# Altium PCB Adapter.PcbDoc
Units mm, origin at the board's own origin, x right, y up, seen from the top; angles counter-clockwise.
Board outline 70 x 70 mm, 2 copper layers (Top Layer, Bottom Layer), stack 0.325 mm thick; 7 components, 24 nets, 80 pads, 0 vias.
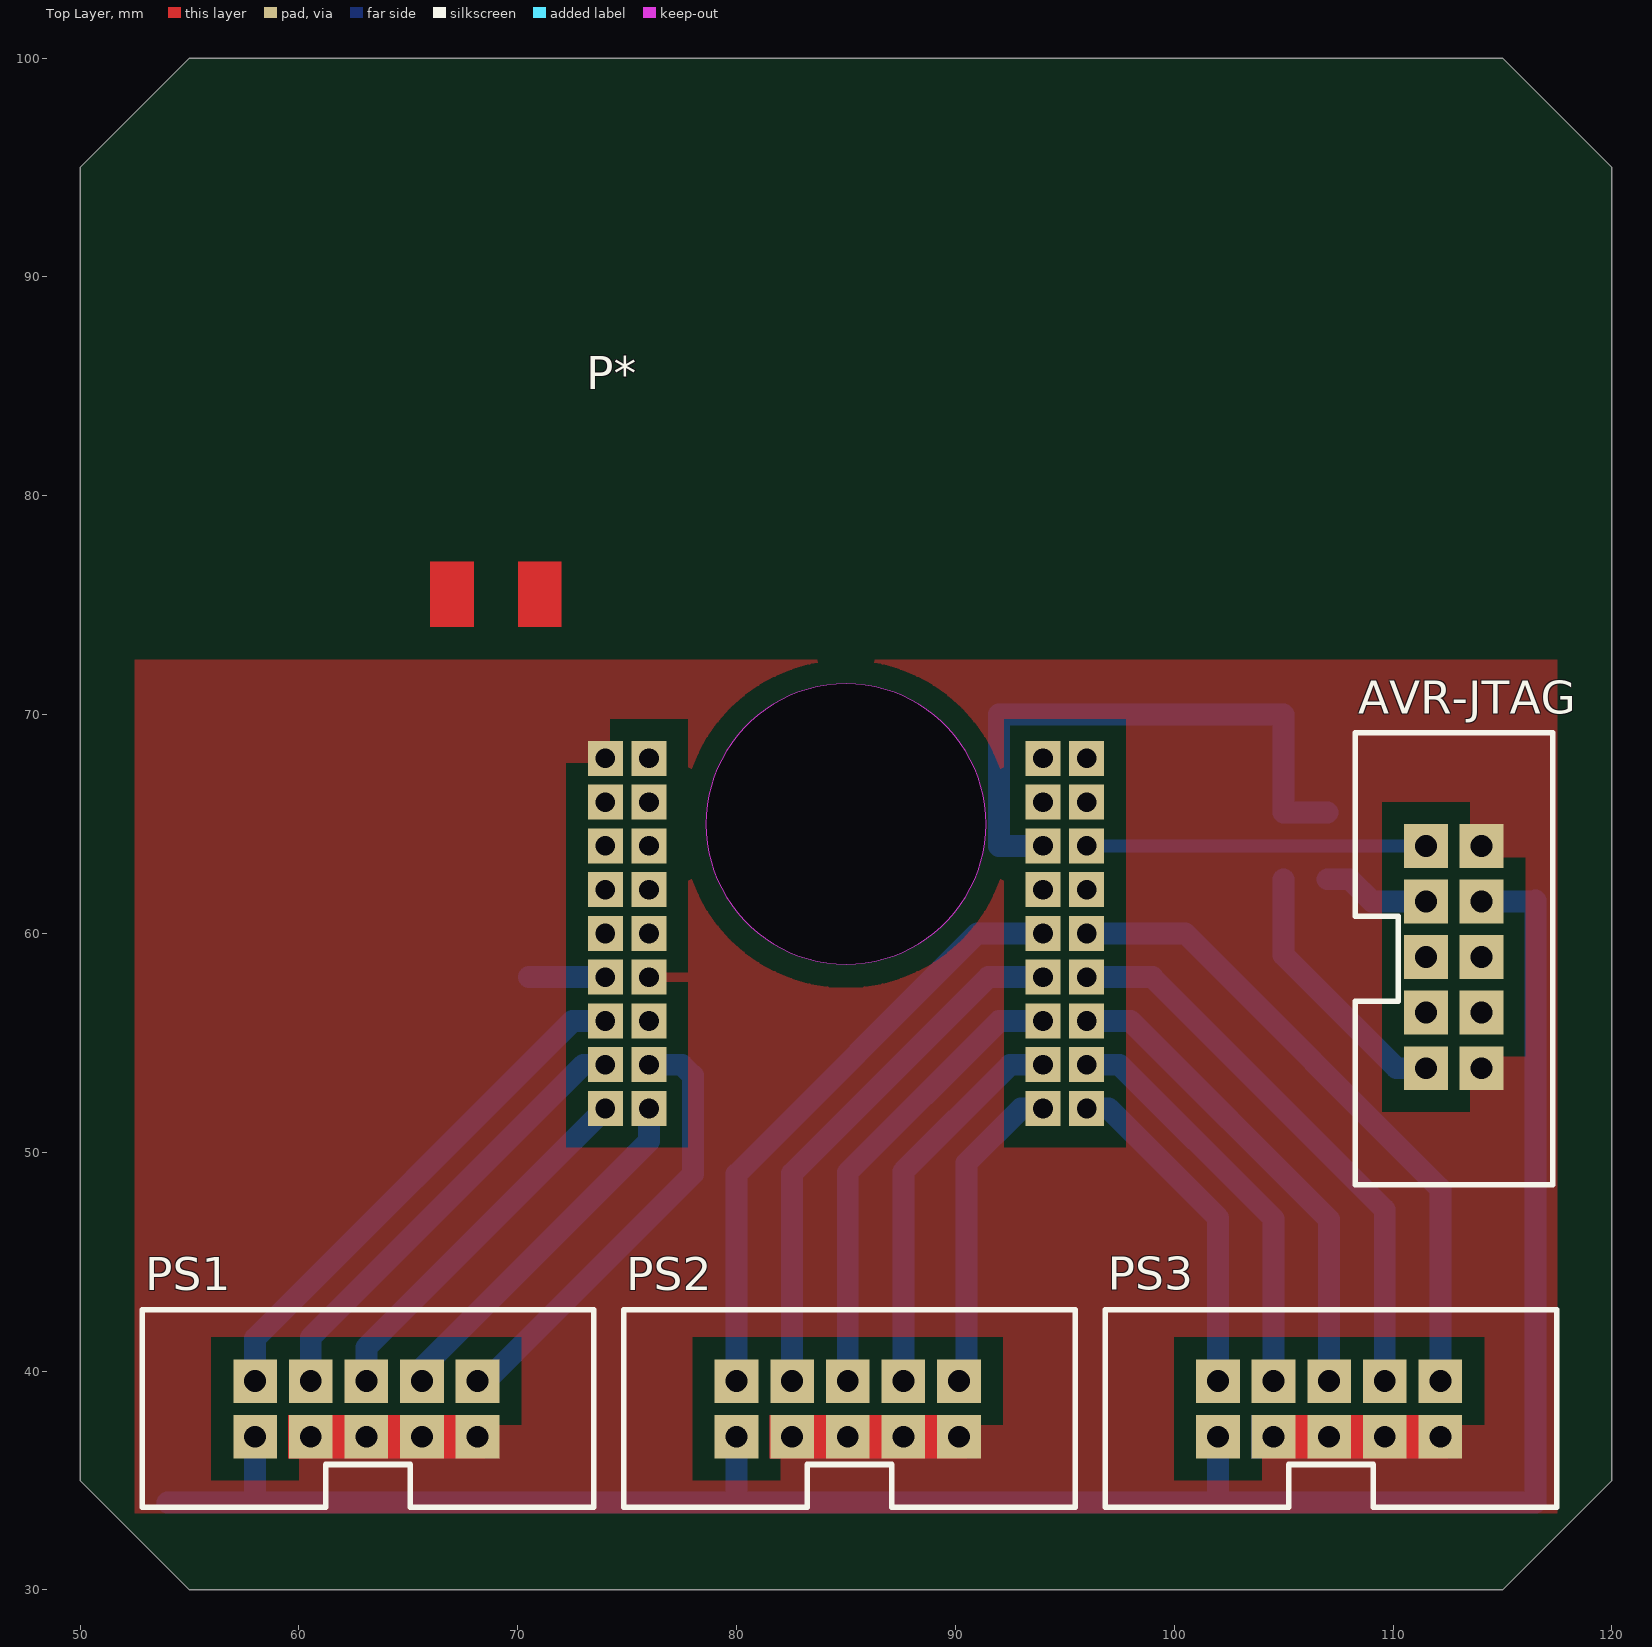
[diagram p0: Top Layer view]
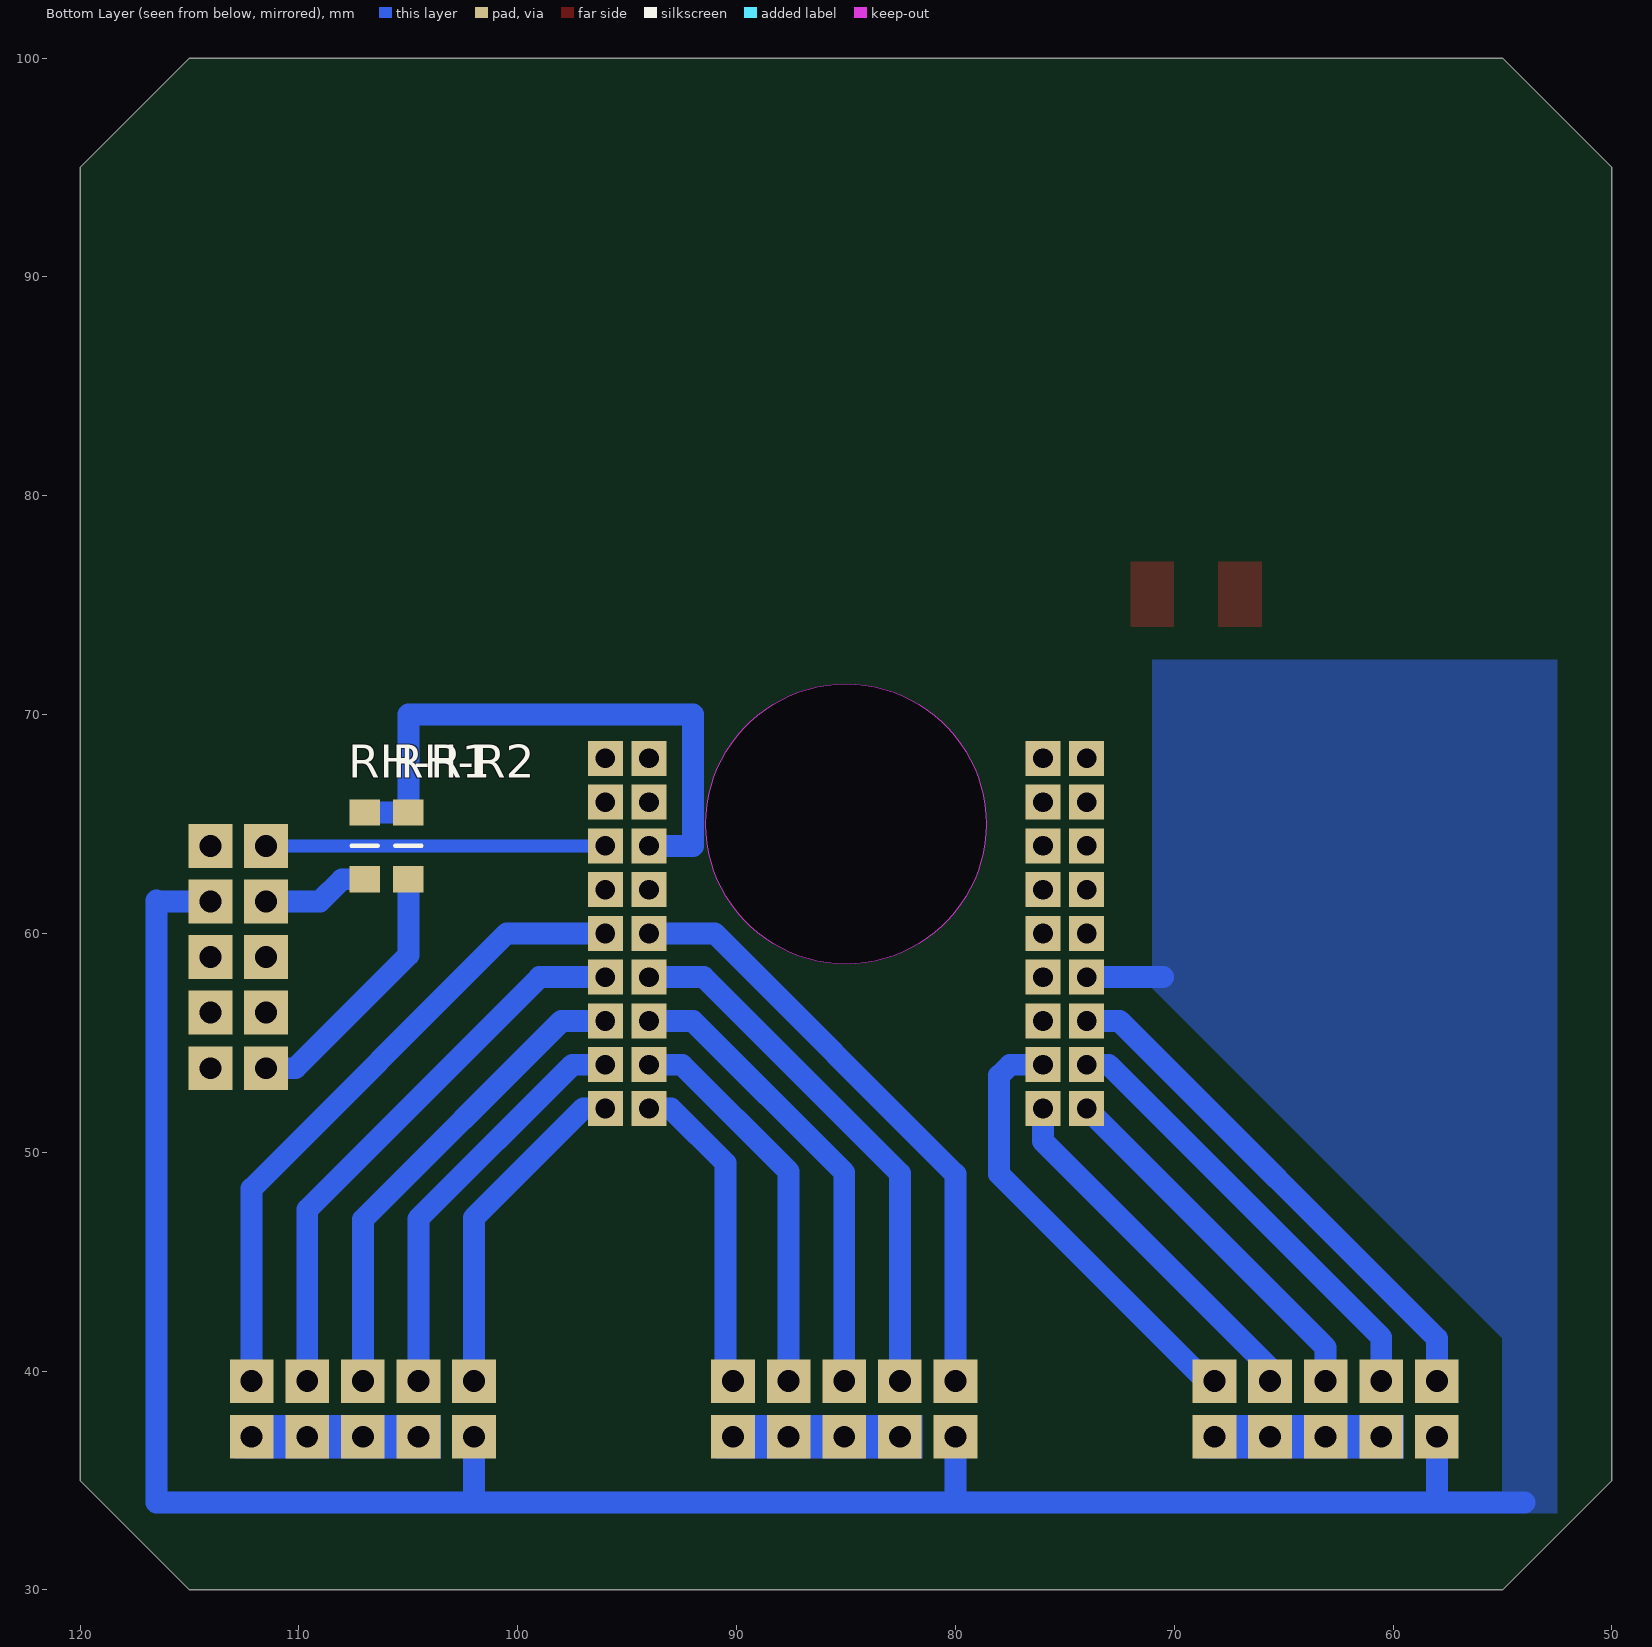
[diagram p1: Bottom Layer view, seen from below]
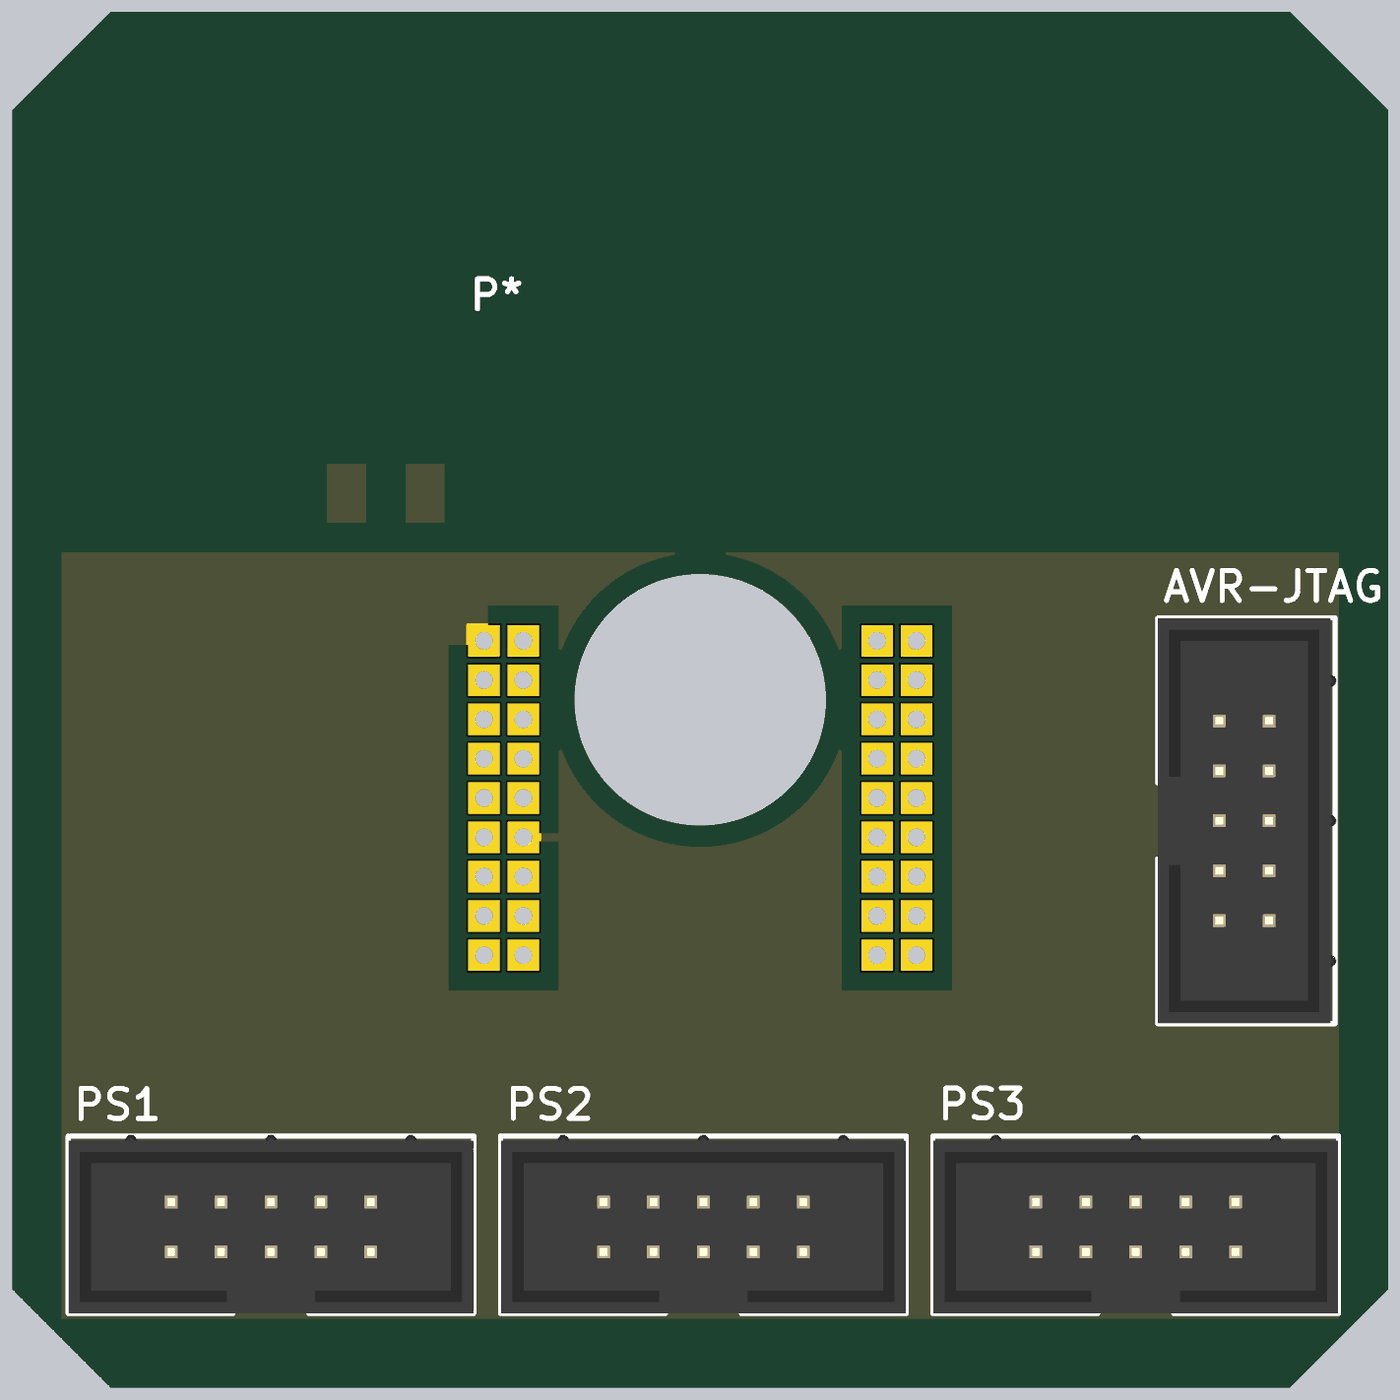
[diagram p2: 3D render of the assembled board from above, using the file's embedded part models]

## Layer stack, top to bottom
Top Layer: signal copper 0.0356
Dielectric 1: core 0.254, FR-4, Dk 4.2
Bottom Layer: signal copper 0.0356

## Board outline
50,35 50,95 55,100 115,100 120,95 120,35 115,30 55,30
cut-out: 78.597,65 ccw(c85,65) 85,58.597 ccw(c85,65) 91.403,65 ccw(c85,65) 85,71.403 ccw(c85,65)

## Design rules (kind name [scope] priority, off if disabled: settings)
Clearance "Polygon Clearance" [InNet('GND')] p1: gap=1
PolygonConnect [All] p1: connectstyle=Direct reliefconductorwidth=0.254 reliefentries=4 polygonreliefangle="90 Angle" airgapwidth=0.254
RoutingVias [All] p1: holewidth=0.711 width=1.27 viastyle="Through Hole" minholewidth=0.711 minwidth=1.27 maxholewidth=0.711 maxwidth=1.27
SolderMaskExpansion [All] p1: expansion=0.102
Width [All] p1: maxlimit=0.254 minlimit=0.254 preferedwidth=0.254
30 further rules are at their usual default settings.

## Classes and differential pairs
component class "AVR Debugger Port": AVR-JTAG RH-R1 RH-R2
component class Top: LED1 LED2 P* PS1 PS2 PS3

## Components (designator, comment, footprint, x,y, rotation, side; value= is the part's Value field where it differs from the comment)
AVR-JTAG "AVR Style" "Header 2x5 IDC-10S" 111.5,64 r0 top
P* "Core51822_2" Core51822 73,51 r0 top
PS1 "Header 2x5" "Header 2x5 IDC-10S" 58,37 r90 top
PS2 "Header 2x5" "Header 2x5 IDC-10S" 80,37 r90 top
PS3 "Header 2x5" "Header 2x5 IDC-10S" 102,37 r90 top
RH-R1 "430R" "R 0805 / 2012 wide" 107,64 r270 bottom
RH-R2 "430R" "R 0805 / 2012 wide" 105,64 r90 bottom

## Footprints (in the part's own frame and the unit in brackets; to place one, negate y for a bottom-side part, rotate by r counter-clockwise, add the part's x,y. Pads: shape width x height; smd on the part's side, far side on the other; paste and mask are expansions set on the pad)
Core51822 [mm]
  rect 1.6x1.6 hole 0.9: 1(1,17) 2(3,17) 3(1,15) 4(3,15) 5(1,13) 6(3,13) 7(1,11) 8(3,11) 9(1,9) 10(3,9) 11(1,7) 12(3,7) 13(1,5) 14(3,5) 15(1,3) 16(3,3) 17(1,1) 18(3,1) 19(21,17) 20(23,17) 21(21,15) 22(23,15) 23(21,13) 24(23,13) 25(21,11) 26(23,11) 27(21,9) 28(23,9) 29(21,7) 30(23,7) 31(21,5) 32(23,5) 33(21,3) 34(23,3) 35(21,1) 36(23,1)
"Header 2x5 IDC-10S" [mm]
  rect 2x2 hole 1: 1(0,0) 2(2.54,0) 3(0,-2.54) 4(2.54,-2.54) 5(0,-5.08) 6(2.54,-5.08) 7(0,-7.62) 8(2.54,-7.62) 9(0,-10.16) 10(2.54,-10.16)
  silkscreen extent -3.22,-15.48 5.8,5.16, body extent -3.22,-15.46 5.88,5.14, height 9.3
"R 0805 / 2012 wide" [mm] "Resistor 0805 / 2012 (2.0 x 1.2 mm)"
  rect 1.2x1.4 smd: 1(-1.524,0) 2(1.524,0)
  silkscreen extent 0,-0.6 0,0.6, body extent -1,-0.63 1,0.62, height 0.45

## Part data
AVR-JTAG: library part "Header JTAG AVR"
RH-R1 RH-R2: library part Resistor

## Nets (pads, with @x,y where several pads share a name; then routed paths per layer and width w, separated by ;. In a path a pad name is that pad's centre, name@x,y a point inside that pad or via, vN(x,y) a via of type N, cw(c..) or ccw(c..) an arc to the next point about the centre after c; other vN are vias at no path point)
3.3V: AVR-JTAG.4
3V3: P*.11 PS1.1 PS2.1 PS3.1 | length 105
  Bottom Layer w1: 54,34 58,34 ; PS1.1 58,34 ; 70.5,58 P*.11 ; PS2.1 80,34 ; PS3.1 102,34 ; 114.04,61.46 116.46,61.46 116.5,61.5 116.5,34 102,34 ; 58,34 80,34 ; 80,34 102,34
GND: AVR-JTAG.2 AVR-JTAG.10 P*.1 P*.12 PS1.3 PS1.5 PS1.7 PS1.9 PS2.3 PS2.5 PS2.7 PS2.9 PS3.3 PS3.5 PS3.7 PS3.9
I2C-CLOCK: P*.5
I2C-DATA: P*.3
NetP*_13: P*.13 PS1.2 | length 24
  Bottom Layer w1: PS1.2 58,41.5 72.5,56 P*.13
NetP*_15: P*.15 PS1.4 | length 20.6
  Bottom Layer w1: PS1.4 60.54,41.54 73,54 P*.15
NetP*_16: P*.16 PS1.10 | length 20.5
  Bottom Layer w1: PS1.10 68.54,39.54 78,49 78,53.5 77.5,54 P*.16
NetP*_17: P*.17 PS1.6 | length 17
  Bottom Layer w1: PS1.6 63.08,41.08 P*.17
NetP*_18: P*.18 PS1.8 | length 16.8
  Bottom Layer w1: PS1.8 65.62,40.12 76,50.5 P*.18
NetP*_27: P*.27 PS2.2 | length 28
  Bottom Layer w1: PS2.2 80,49 91,60 P*.27
NetP*_28: P*.28 PS3.10 | length 29.8
  Bottom Layer w1: P*.28 100.5,60 112.16,48.34 PS3.10
NetP*_29: P*.29 PS2.4 | length 24.7
  Bottom Layer w1: PS2.4 82.54,49.04 91.5,58 P*.29
NetP*_30: P*.30 PS3.8 | length 25.9
  Bottom Layer w1: P*.30 99,58 109.62,47.38 PS3.8
NetP*_31: P*.31 PS2.6 | length 21.3
  Bottom Layer w1: PS2.6 85.08,49.08 92,56 P*.31
NetP*_32: P*.32 PS3.6 | length 22.2
  Bottom Layer w1: P*.32 98,56 107.08,46.92 PS3.6
NetP*_33: P*.33 PS2.8 | length 17.5
  Bottom Layer w1: PS2.8 87.62,49.12 92.5,54 P*.33@93.5,54
NetP*_34: P*.34 PS3.4 | length 18.4
  Bottom Layer w1: P*.34@96.5,54 97.5,54 104.54,46.96 PS3.4
NetP*_35: P*.35 PS2.10 | length 14.6
  Bottom Layer w1: PS2.10 90.5,39.88 90.5,49.5 93,52 P*.35
NetP*_36: P*.36 PS3.2 | length 15.5
  Bottom Layer w1: P*.36 97,52 102,47 PS3.2
SWDCLK: AVR-JTAG.1 P*.24 | length 15.5
  Bottom Layer w0.6: P*.24 AVR-JTAG.1
SWDIO: P*.23 RH-R1.1 RH-R2.2 | length 27.5
  Bottom Layer w1: P*.23 92,64 92,70 105,70 RH-R2.2 RH-R1.1
TDI: AVR-JTAG.9 RH-R2.1 | length 12.1
  Bottom Layer w1: RH-R2.1 105,59 110.16,53.84 AVR-JTAG.9
TDO: AVR-JTAG.3 RH-R1.2 | length 4.9
  Bottom Layer w1: RH-R1.2 108.024,62.476 109.04,61.46 AVR-JTAG.3
pads on no net: AVR-JTAG.5 AVR-JTAG.6 AVR-JTAG.7 AVR-JTAG.8 P*.2 P*.4 P*.6 P*.7 P*.8 P*.9 P*.10 P*.14 P*.19 P*.20 P*.21 P*.22 P*.25 P*.26

## Polygon pours and split planes (outlines as drawn)
GND on Top Layer "GND Plane" (solid, pour order 4): 52.5,33.5 117.5,33.5 117.5,72.5 52.5,72.5
3V3 on Bottom Layer "Power Plane" (solid, pour order 6): 71,72.5 71,57.5 55,41.5 55,33.5 52.5,33.5 52.5,41.5 52.5,72.5

## Other copper
Top Layer:
  rectangle: 66,74 68,77
  rectangle: 70,74 72,77
  rectangle net GND: 104,36 112.5,38
  rectangle net GND: 59.5,36 68.5,38
  rectangle net GND: 81.5,36 90.5,38
Bottom Layer:
  rectangle net GND: 103.5,36 113,38
  rectangle net GND: 81.5,36 91,38
  rectangle net GND: 59.5,36 69,38

## Silkscreen, mask and mechanical layers (free items; w line width, h text height)
Cutting Inside:
  circle w0.254: c85,65 r6.403
  pour cut-out: 78.597,65 ccw(c85,65) 85,58.597 ccw(c85,65) 91.403,65 ccw(c85,65) 85,71.403 ccw(c85,65)
Cutting Outside:
  the board outline again, w1